# Altium PCB DCCRegulator.PcbDoc
Units mm, origin at the board's own origin, x right, y up, seen from the top; angles counter-clockwise.
Board outline 115.95 x 77.34 mm, 2 copper layers (Top Layer, Bottom Layer); 25 components, 14 nets, 56 pads, 0 vias.
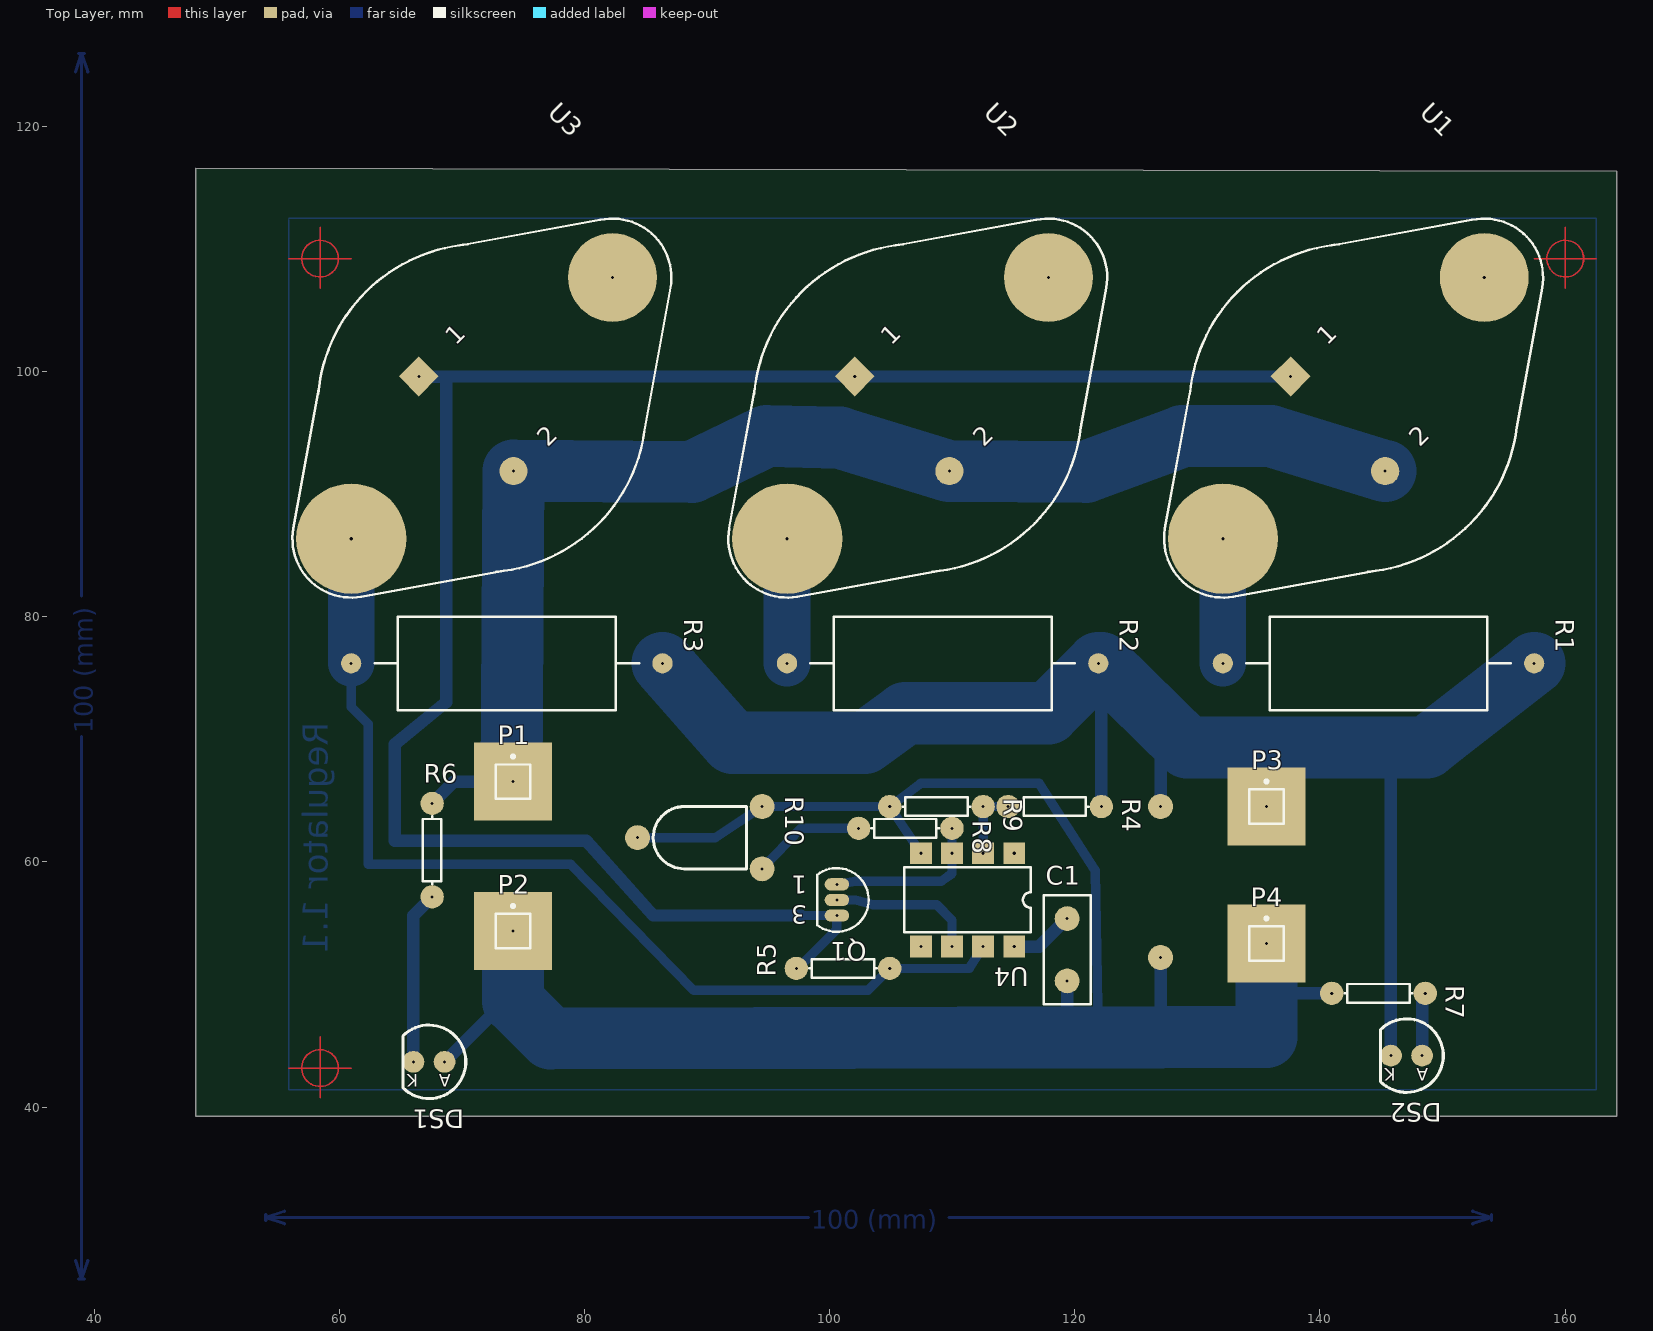
[diagram p0: Top Layer view]
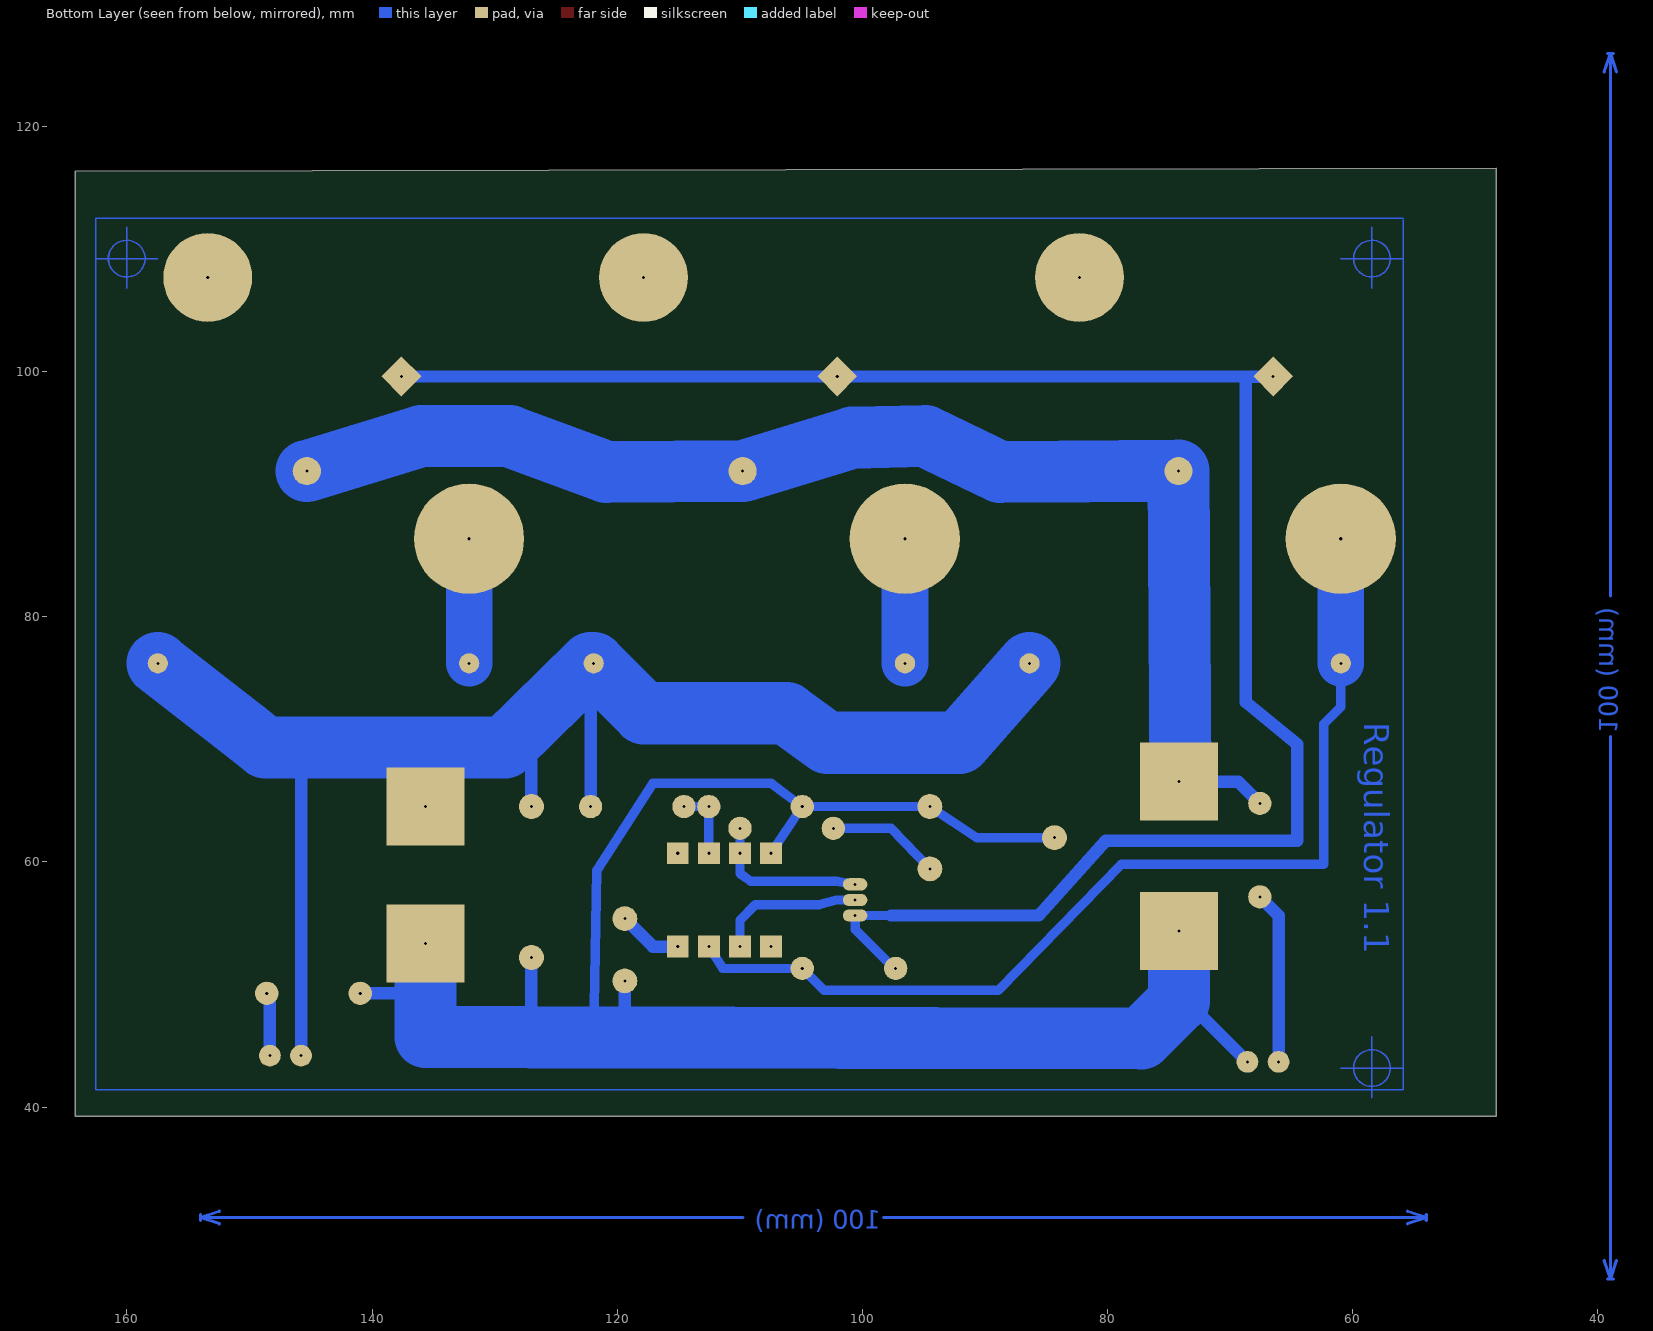
[diagram p1: Bottom Layer view, seen from below]

## Layer stack, top to bottom
Top Layer: signal copper 0.0356
Dielectric: dielectric 0.32, FR-4, Dk 4.8
Bottom Layer: signal copper 0.0356

## Board outline
48.26,116.586 48.26,39.243 164.211,39.243 164.211,116.332

## Design rules (kind name [scope] priority, off if disabled: settings)
Clearance [All] p1: gap=0.254
ComponentClearance [All] p1: gap=0.254 collisioncheckmode=0
HoleSize [All] p1: absolutevalues=TRUE maxlimit=25.375 minlimit=0.025 maxpercent=80.000 minpercent=20.000
PolygonConnect [All] p1: connectstyle=Relief reliefconductorwidth=0.254 reliefentries=4 polygonreliefangle="90 Angle"
RoutingLayers [All] p1: top layer=Horizontal bottom layer=Vertical
RoutingVias [All] p1: holewidth=0.711 width=1.27 viastyle="Through Hole" minholewidth=0.711 minwidth=1.27 maxholewidth=0.711 maxwidth=1.27
SolderMaskExpansion [All] p1: expansion=0.102
TestPointUsage [All] p1: valid=0 allowmultiple=FALSE
Testpoint [All] p1: side=15 testpointundercomponent=TRUE minsize=1.016 maxsize=2.54 preferedsize=1.524 minholesize=0 maxholesize=1.016 preferedholesize=0.813 testpointgrid=0.025 style=1023 order=-539222988
Width [All] p1: maxlimit=25.375 minlimit=0.762 preferedwidth=0.762
15 further rules are at their usual default settings.

## Components (designator, comment, footprint, x,y, rotation, side; value= is the part's Value field where it differs from the comment)
C1 "Cap" RAD-0.2 119.38,52.832 r90 top
DS1 "Power In" LED5mm 68.58,43.688 r180 top
DS2 "Power Out" LED5mm 148.336,44.196 r180 top
P1 "Plug" PIN1 74.168,66.548 r0 top
P2 "Plug" PIN1 74.168,54.356 r0 top
P3 "Plug" PIN1 135.636,64.516 r0 top
P4 "Plug" PIN1 135.636,53.34 r0 top
Q1 "BC327" 29-04 100.584,56.896 r180 top
R1 "Res2" AXIAL-1.0 144.78,76.2 r0 top
R2 "Res2" AXIAL-1.0 109.22,76.2 r0 top
R3 "Res2" AXIAL-1.0 73.66,76.2 r0 top
R4 "Res2" AXIAL-0.3 118.364,64.516 r0 top
R5 "Res2" AXIAL-0.3 101.092,51.308 r180 top
R6 "Res2" AXIAL-0.3 67.564,60.96 r90 top
R7 "Res2" AXIAL-0.3 144.78,49.276 r0 top
R8 "Res2" AXIAL-0.3 106.172,62.738 r0 top
R9 "Res2" AXIAL-0.3 108.712,64.516 r0 top
R10 "RPot" "Horizontal Trim Pot" 94.488,61.976 r270 top
U1 "LM350K" 1-03 142.748,97.028 r45 top
U2 "LM350K" 1-03 107.188,97.028 r45 top
U3 "LM350K" 1-03 71.628,97.028 r45 top
U4 "LM308N" 626-05 111.252,56.896 r180 top
? "" Crosshair 160.02,109.22 r270 top
? "" Crosshair 58.42,109.22 r270 top
? "" Crosshair 58.42,43.18 r270 top

## Footprints (in the part's own frame and the unit in brackets; to place one, negate y for a bottom-side part, rotate by r counter-clockwise, add the part's x,y. Pads: shape width x height; smd on the part's side, far side on the other; paste and mask are expansions set on the pad)
1-03 [mm] "Oval Flange Mount with (2) Offset Leads; Pin Spacing 10.92 mm; Lead Dia. 1.09 mm (max)"
  rect 2.3x2.3 hole 0.254: 1(-1.815,5.46)
  round 2.3 hole 0.254: 2(-1.815,-5.46)
  round 9 hole 0.254: 3(-15.075,0)
  round 7.25 hole 0.254: 4(15.075,0)
  silkscreen extent -19.87,-13.4 19.87,13.4
29-04 [mm] "TO, Flat Index; 3 In-Line, Axial Leads; Body Dia. 4.8mm; Leads 0.48 x 0.5 mm (max)"
  oval 2x1 hole 0.254: 1(0,-1.27) 2(0,0) 3(0,1.27)
  silkscreen extent -2.6,-2.6 1.6,2.6
626-05 [mil] "DIP; 8 Leads; Row Spacing 7.62 mm; Pitch 2.54 mm"
  rect 70x70 hole 10: 1(-150,-150) 2(-50,-150) 3(50,-150) 4(150,-150) 5(150,150) 6(50,150) 7(-50,150) 8(-150,150)
  silkscreen extent -203,-104 203,104
AXIAL-0.3 [mil]
  round 75 hole 10: 1(-150,0) 2(150,0)
  silkscreen extent -109,-30 109,30
AXIAL-1.0 [mm]
  round 1.65 hole 0.254: 1(-12.7,0) 2(12.7,0)
  silkscreen extent -10.79,-3.81 10.79,3.81
Crosshair [mm] "Mounting Hole pad"
  Multi-Layer circle w0.127: c0,0 r1.5
  Multi-Layer lines w0.127: 0,-2.54 0,2.54 ; 2.413,0 -2.54,0
"Horizontal Trim Pot" [mil]
  round 80 hole 10: 1(-100,0) 2(100,0) 3(0,-400)
  silkscreen extent -100,-350 100,-50
LED5mm [mil] "LED 5mm through hole"
  round 70 hole 10: 1(100,0) 2(0,0)
  silkscreen extent -68,-118 134,118
PIN1 [mil]
  rect 250x250 hole 10: 1(0,0)
  silkscreen extent -55,-55 55,86
RAD-0.2 [mil]
  round 80 hole 10: 1(-100,0) 2(100,0)
  silkscreen extent -175,-75 175,75

## Part data
C1: "Capacitor"
DS1 DS2: library part LED0, "Typical INFRARED GaAs LED"
Q1: "Amplifier Transistor PNP Silicon"
R1 R2 R3 R4 R5 R6 R7 R8 R9: "Resistor"
R10: "Potentiometer"
U1 U2 U3: "3-Terminal Adjustable Positive Voltage Regulator"
U4: "Precision Operational Amplifier"

## Free pads (board coordinates)
  round 2.032 hole 0.254: 0(127,52.197) 1(127,64.516)

## Nets (pads, with @x,y where several pads share a name; then routed paths per layer and width w, separated by ;. In a path a pad name is that pad's centre, name@x,y a point inside that pad or via, vN(x,y) a via of type N, cw(c..) or ccw(c..) an arc to the next point about the centre after c; other vN are vias at no path point)
GND: C1.1 DS1.2 P2.1 P4.1 pad.0 R7.1 R9.1 R10.1 R10.3 U4.4 | length 160.7
  Bottom Layer w0.762: 73.787,48.895 74.168,48.895 ; R10.3 90.678,61.976 R10.1 R9.1 ; U4.4 R9.1 ; 121.92,45.974 121.666,59.309 117.094,66.421 107.442,66.421 R9.1
  Bottom Layer w1.016: DS1.2 73.787,48.895 ; 119.38,45.72 C1.1 ; 127,45.593 127,45.701 pad.0 ; 135.636,49.276 R7.1
  Bottom Layer w5.08: P2.1 74.168,48.895 74.168,48.641 77.216,45.593 127,45.701 135.636,45.72 ; 135.636,45.847 135.636,49.276 P4.1
NetC1_2: C1.2 U4.8 | length 5.3
  Bottom Layer w1.016: U4.8 117.094,53.086 C1.2
NetDS1_1: DS1.1 R6.1 | length 14.1
  Bottom Layer w1.016: DS1.1 66.04,55.626 R6.1
NetDS2_2: DS2.2 R7.2 | length 5.2
  Bottom Layer w1.016: DS2.2 148.336,49.022 R7.2
NetQ1_1: Q1.1 R8.2 U4.3 | length 13.3
  Bottom Layer w0.762: Q1.1 102.108,58.42 109.093,58.42 109.982,59.055 U4.3 R8.2
NetQ1_2: Q1.2 U4.6 | length 12.1
  Bottom Layer w0.762: Q1.2 102.108,56.896 103.505,56.515 108.712,56.515 109.982,55.245 U4.6
NetQ1_3: Q1.3 R5.2 U1.1 U2.1 U3.1 | length 155.6
  Bottom Layer w0.762: R5.2@97.282,51.181 97.346,51.244 100.584,54.483 Q1.3 97.663,55.626
  Bottom Layer w1.016: U3.1@66.484,99.573 68.707,99.575 U2.1 U1.1 ; 68.707,99.568 68.707,73.025 64.516,69.596 64.516,61.722 70.358,61.722 80.137,61.722 85.598,55.626 97.663,55.626
NetR1_1: R1.1 U1.3 | length 10.2
  Bottom Layer w3.81: R1.1 U1.3@132.08,86.36
NetR2_1: R2.1 U2.3 | length 10.2
  Bottom Layer w3.81: R2.1 U2.3@96.52,86.36
NetR3_1: R3.1 R5.1 U3.3 U4.7 | length 83.3
  Bottom Layer w0.762: R3.1 60.96,72.644 62.357,71.247 62.357,59.817 78.867,59.817 88.9,49.53 103.124,49.53 R5.1 111.379,51.308 U4.7
  Bottom Layer w3.81: R3.1 U3.3@60.96,86.36
NetR4_1: R4.1 R9.2 U4.2 | length 5.8
  Bottom Layer w0.762: U4.2 R9.2 R4.1
NetR8_1: R8.1 R10.2 | length 9.3
  Bottom Layer w0.762: R10.2 97.663,62.738 R8.1
VIN: P1.1 R6.2 U1.2 U2.2 U3.2 | length 107.6
  Bottom Layer w0.762: P1.1@73.152,67.564 74.043,66.673 P1.1
  Bottom Layer w1.016: R6.2 69.342,66.548 74.043,66.548 P1.1
  Bottom Layer w5.08: P1.1@74.041,66.294 P1.1@74.043,66.548 ; P1.1@74.043,66.549 74.043,66.673 U3.2 74.206,91.923 88.773,91.821 94.869,94.742 100.838,94.615 U2.2 120.904,91.821 128.778,94.742 136.017,94.742 U1.2
VOUT: DS2.1 P3.1 pad.1 R1.2 R2.2 R3.2 R4.2 | length 128.3
  Bottom Layer w1.016: R4.2 R2.2@122.174,75.946 ; pad.1 127,70.104 ; DS2.1 145.796,69.342
  Bottom Layer w5.08: R3.2 92.075,69.723 102.87,69.723 106.172,72.136 117.856,72.136 R2.2 ; R2.2@122.174,76.2 129.159,69.342 135.636,69.342 145.796,69.342 148.717,69.342 150.155,70.468 R1.2 ; P3.1 135.636,69.215
pads on no net: U1.4 U2.4 U3.4 U4.1 U4.5
copper on no net: | length 547.4
  Bottom Layer w0.127: 55.88,112.395 55.88,41.402 162.56,41.402 162.56,112.522 55.88,112.522
  Bottom Layer w0.254: 38.456,27.494 38.964,25.97 ; 38.456,124.446 38.964,125.97 ; 38.71,25.97 39.218,25.97 ; 38.71,125.97 39.218,125.97 ; 38.964,70.231 38.964,25.97 ; 38.964,81.708 38.964,125.97 ; 39.472,27.494 38.964,25.97 ; 39.472,124.446 38.964,125.97 ; 53.989,30.734 53.989,31.242 ; 55.513,30.48 53.989,30.988 ; 55.513,31.496 53.989,30.988 ; 98.251,30.988 53.989,30.988 ; 109.728,30.988 153.989,30.988 ; 152.465,30.48 153.989,30.988 ; 152.465,31.496 153.989,30.988 ; 153.989,30.734 153.989,31.242

## Other copper
Bottom Layer:
  text "Regulator 1.1" at 59.055,71.374 h2.03 r90
  text "100 (mm)" at 39.878,70.485 h1.52 r90
  text "100 (mm)" at 98.505,30.074 h1.52

## Text inside footprints (layer, text, board x,y; h text height)
DS1: Top Overlay "A" at 69.088,42.672 h1 r180; Top Overlay "K" at 66.421,42.672 h1 r180
DS2: Top Overlay "A" at 148.844,43.18 h1 r180; Top Overlay "K" at 146.177,43.18 h1 r180
Q1: Top Overlay "3" at 98.163,56.429 h1.5 r180; Top Overlay "1" at 98.163,58.875 h1.5 r180
U1: Top Overlay "1" at 140.593,102.057 h1.5 r45; Top Overlay "2" at 148.136,93.795 h1.5 r45
U2: Top Overlay "1" at 105.033,102.057 h1.5 r45; Top Overlay "2" at 112.576,93.795 h1.5 r45
U3: Top Overlay "1" at 69.473,102.057 h1.5 r45; Top Overlay "2" at 77.016,93.795 h1.5 r45